# EAGLE board 16_POS_0_5MM_PITCH_36MM_LENGTH (EAGLE 9.6.2)
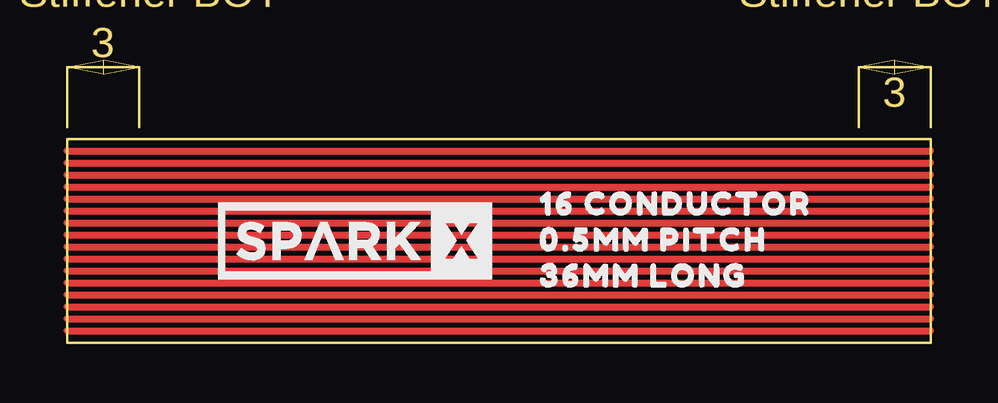
[diagram p0: board, top side]

Size 36 x 8.5 mm. Coordinates in mm from the lower left corner, seen from the top.
Outline: 0,0 0,8.5 36,8.5 36,0 0,0
Copper layers (1*16): Top 0.035mm / dielectric 1.5mm / Bottom 0.035mm
Design rules "SparkFun-2-Layer-General-JLCPCB": minimum track width 7mil, minimum drill 0.3mm, track to track 7mil, track to pad 7mil, pad to pad 7mil, via to via 7mil, smd to smd 7mil, copper to edge 7mil, drill to drill 7mil, minimum pad ring 7mil, minimum via ring 7mil, stop-mask expansion 4mil, vias tented up to drill 25mil, thermal gap 10mil

## Placement (x,y rotation side)
E$2  [0#5MM_PITCH1]  19,4.3 0 top
E$3  [16_CONDUCTOR0]  19,5.8 0 top
E$4  [SPARKX-LARGE]  12,4.25 0 top
E$5  [36MM_LONG0]  19,2.8 0 top

## Library data of the parts
E$2 = labels
E$3 E$5 = output
E$4 = SparkX

## Tracks (layer width: path | path; a pad name or v marks a point on that pad's centre or on a via)
S$1  (11 unrouted)
  Top 0.3: 0,0.5 36,0.5 | 0,1 36,1 | 0,1.5 36,1.5 | 0,2 36,2 | 0,2.5 36,2.5 | 0,3 36,3 | 0,3.5 36,3.5 | 0,4 36,4 | 0,6.5 36,6.5 | 0,7 36,7 | 0,7.5 36,7.5 | 0,8 36,8
S$2  (3 unrouted)
  Top 0.3: 0,4.5 36,4.5 | 0,5 36,5 | 0,5.5 36,5.5 | 0,6 36,6

## Text on the board
Dimension: Stiffener BOT | Stiffener BOT